# Altium PCB regulator.PcbDoc
Units mm, origin at the board's own origin, x right, y up, seen from the top; angles counter-clockwise.
Board outline 152.4 x 101.6 mm, 2 copper layers (Top Layer, Bottom Layer); 20 components, 10 nets, 46 pads, 0 vias.
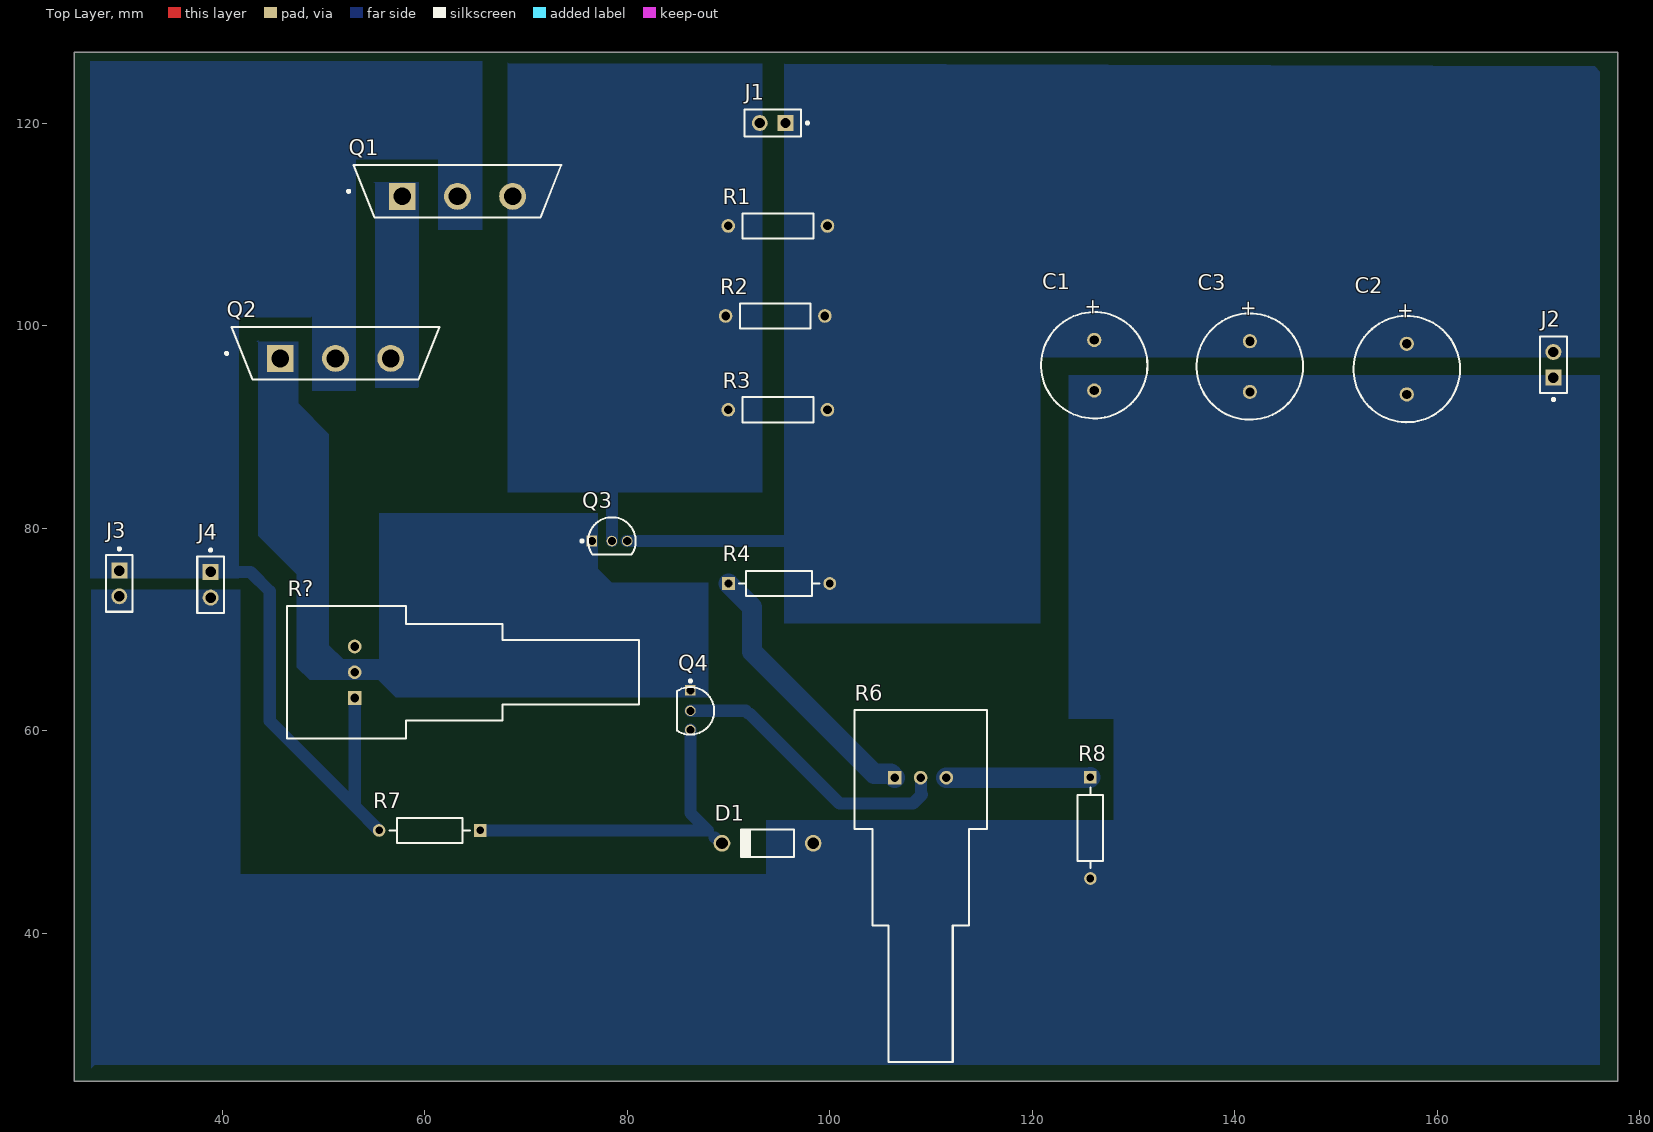
[diagram p0: Top Layer view]
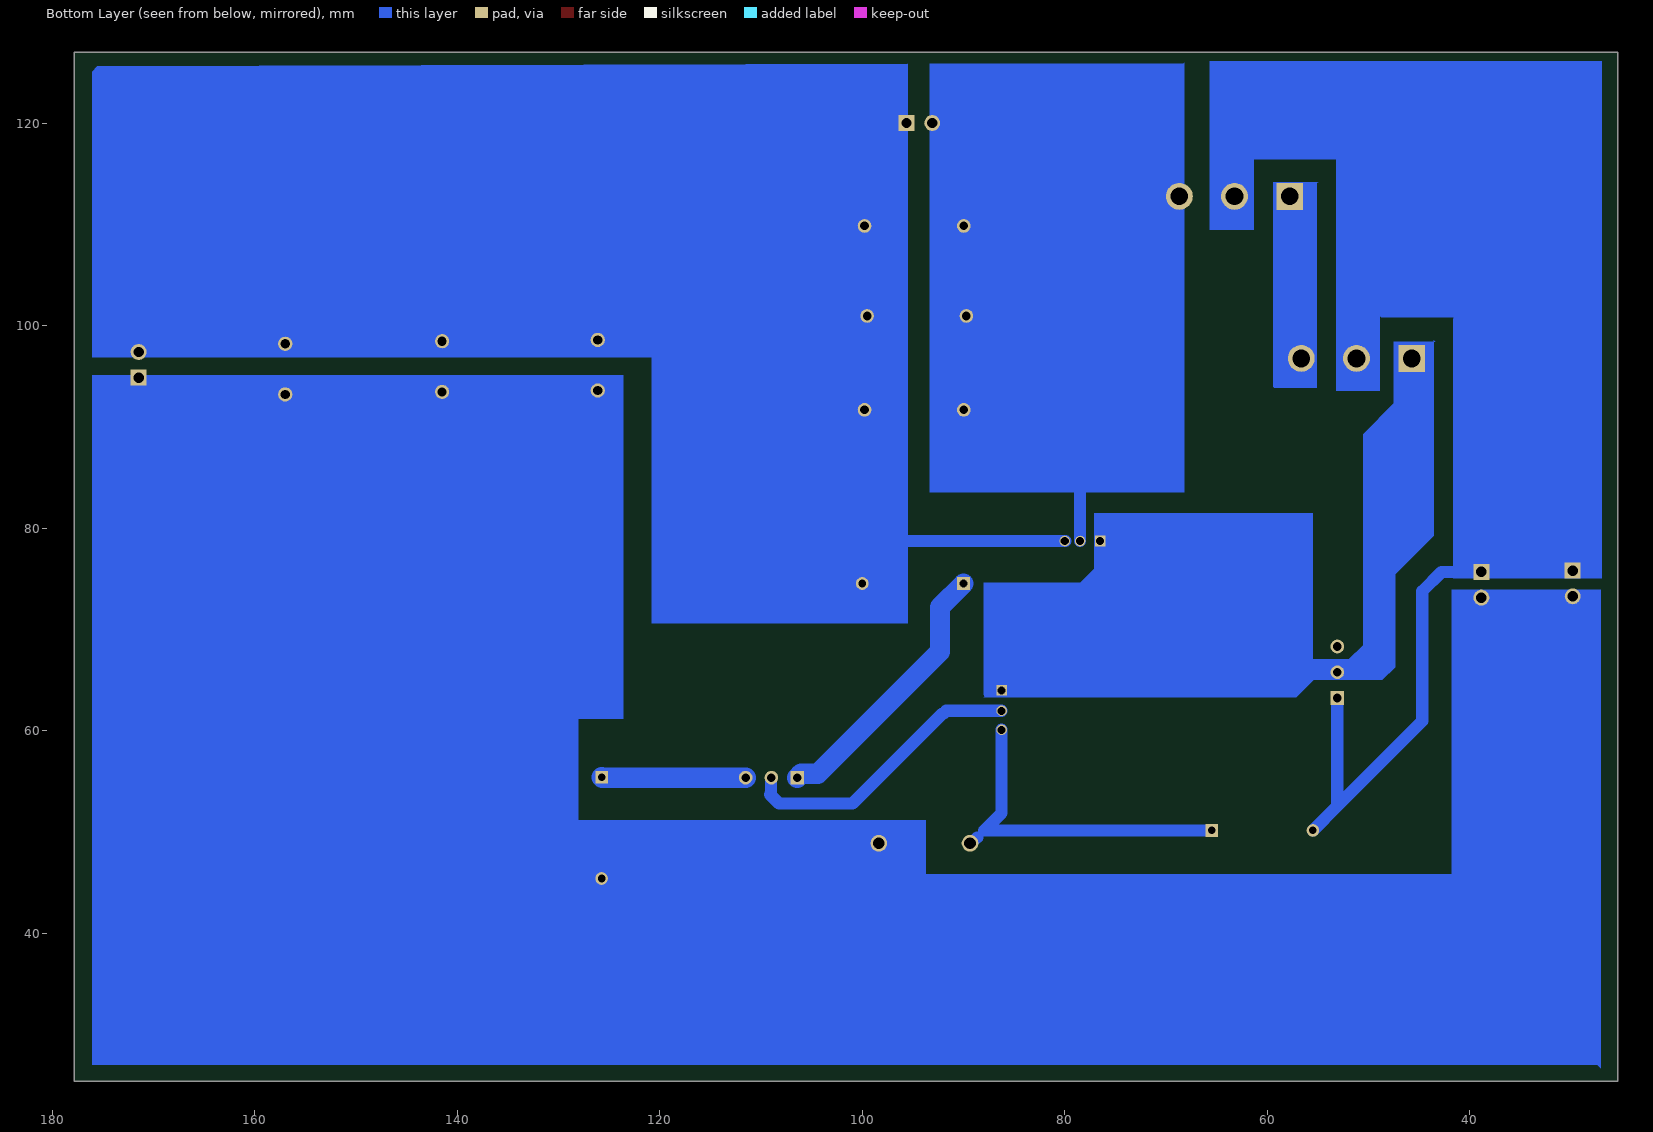
[diagram p1: Bottom Layer view, seen from below]
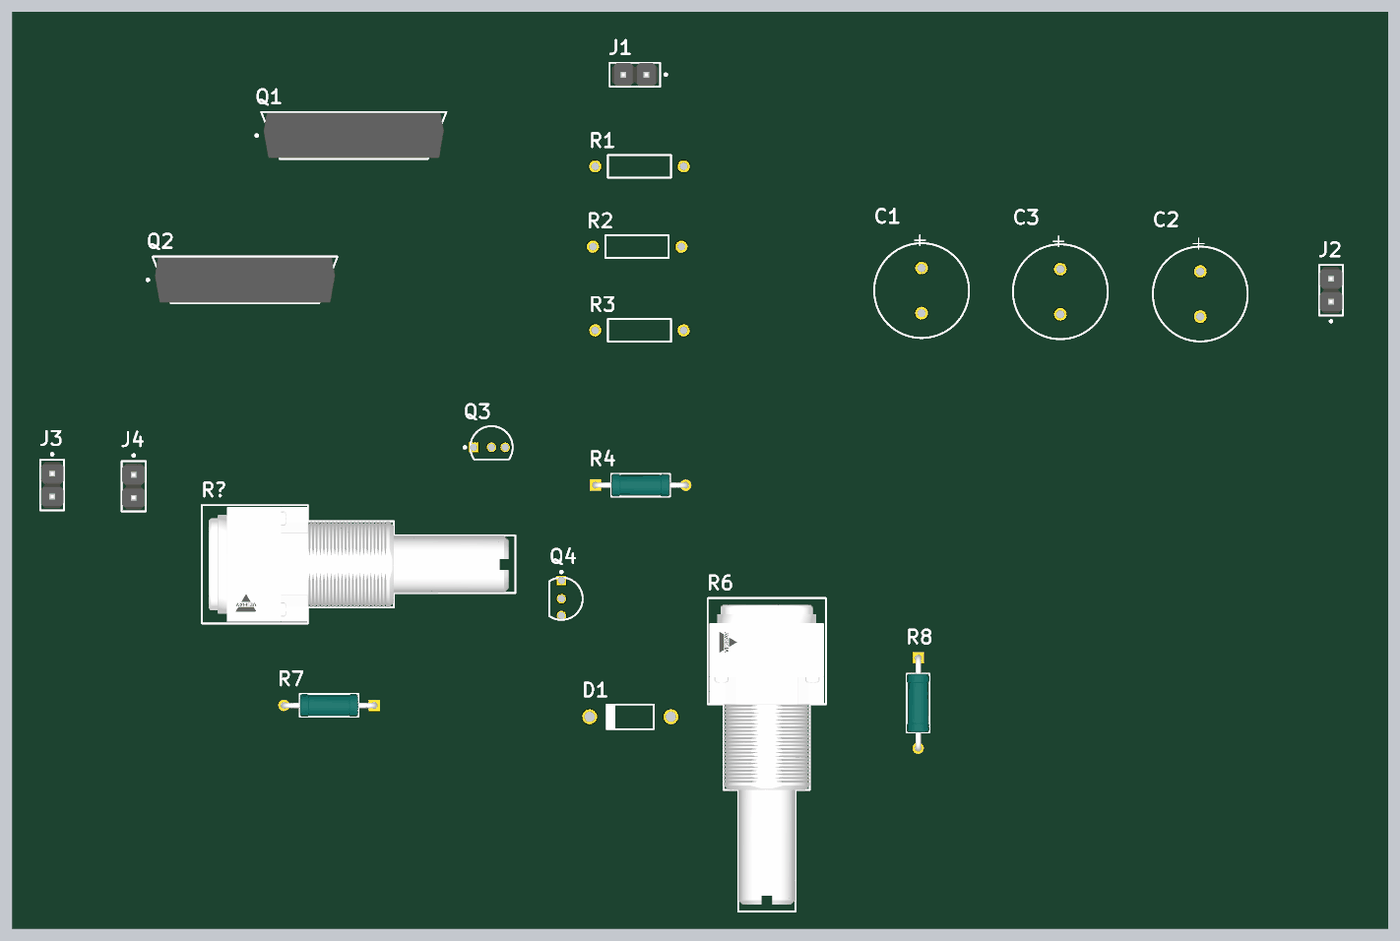
[diagram p2: 3D render of the assembled board from above, using the file's embedded part models]

## Layer stack, top to bottom
Top Solder: solder mask 0.0102, Solder Resist, Dk 3.5
Top Layer: signal copper 0.0356
Dielectric 1: dielectric 0.32, FR-4, Dk 4.8
Bottom Layer: signal copper 0.0356
Bottom Solder: solder mask 0.0102, Solder Resist, Dk 3.5

## Board outline
25.4,25.4 177.8,25.4 177.8,127 25.4,127

## Design rules (kind name [scope] priority, off if disabled: settings)
Clearance [All] p1: gap=0.254 ignorepadtopadclearanceinfootprint=FALSE except(0: Arc-Hole Track-Hole SMDPad-Hole THPad-Hole Via-Hole Fill-Hole Poly-Hole Region-Hole Text-Hole)
PolygonConnect [All] p1: connectstyle=Relief reliefconductorwidth=0.254 reliefentries=4 polygonreliefangle="90 Angle" airgapwidth=0.254
RoutingVias [All] p1: holewidth=0.711 width=1.27 viastyle="Through Hole" minholewidth=0.711 minwidth=1.27 maxholewidth=0.711 maxwidth=1.27
SilkToSilkClearance [All] p1: silktosilkclearance=0
SilkToSolderMaskClearance [IsPad] p1: minsilkscreentomaskgap=0 clearancetoexposedcopper=TRUE
SolderMaskExpansion [All] p1: expansion=0.102 istentingtop=FALSE
Width [All] p1: maxlimit=2 minlimit=0.7 preferedwidth=1.2
28 further rules are at their usual default settings.

## Components (designator, comment, footprint, x,y, rotation, side; value= is the part's Value field where it differs from the comment)
C1 "ECA-1HHG471" PNSC-CAP-10x20-P2 126.111,96.099 r270 top
C2 "ECA-1HHG471" PNSC-CAP-10x20-P2 156.972,95.718 r270 top
C3 "ECA-1HHG471" PNSC-CAP-10x20-P2 141.478,95.972 r270 top
D1 "1N4738A" FAIR-DO-41-2_V 93.853,48.895 r180 top
J1 "M20-9990246" FP-M20-9990246-MFG 94.361,120.015 r180 top
J2 "M20-9990246" FP-M20-9990246-MFG 171.45,96.139 r90 top
J3 "M20-9990246" FP-M20-9990246-MFG 29.845,74.549 r270 top
J4 "M20-9990246" FP-M20-9990246-MFG 38.862,74.422 r270 top
Q1 "2SC5200-O(Q)" FP-2-21F1A-MFG 63.235,113.276 r90 top
Q2 "2SC5200-O(Q)" FP-2-21F1A-MFG 51.192,97.274 r90 top
Q3 "BC547B" ONSC-TO-92-3-29-11#1 78.486,78.74 r0 top
Q4 "BC547B" ONSC-TO-92-3-29-11#2 86.233,61.976 r270 top
R1 "OD103JE" OMTE-RES7X2.5-2 94.869,109.855 r0 top
R2 "OD103JE" OMTE-RES7X2.5-2 94.615,100.965 r0 top
R3 "OD103JE" OMTE-RES7X2.5-2 94.869,91.694 r0 top
R4 "MRS25000C1001FCT00" FP-MRS25-MFG 94.996,74.549 r0 top
R6 "248FGJSPXB25102MA" FP-248FGJSPXB25102MA-MFG 108.966,44.679 r90 top
R7 "MRS25000C1001FCT00" FP-MRS25-MFG 60.499,50.165 r180 top
R8 "MRS25000C1001FCT00" FP-MRS25-MFG 125.73,50.419 r270 top
R? "248FGJSPXB25102MA" FP-248FGJSPXB25102MA-MFG 63.779,65.786 r180 top

## Footprints (in the part's own frame and the unit in brackets; to place one, negate y for a bottom-side part, rotate by r counter-clockwise, add the part's x,y. Pads: shape width x height; smd on the part's side, far side on the other; paste and mask are expansions set on the pad)
FAIR-DO-41-2_V [mm] "2-Leads, Axial leaded, Body 2.72x5.2mm, Pin Spacing 9mm"
  round 1.65 hole 1.15: 1(-4.5,0) 2(4.5,0)
  silkscreen extent -2.6,-1.36 2.6,1.36, body extent -4.93,-1.36 4.93,1.36, height 2.71
FP-2-21F1A-MFG [mm]
  rect 2.65x2.65 hole 1.75 paste-1000 mask+0: 1(-0.5,5.45)
  round 2.65 hole 1.75 paste-1000 mask+0: 2(-0.5,0) 3(-0.5,-5.45)
  silkscreen extent -2.6,-10.25 2.6,10.87, body extent -2.7,-10.35 2.7,10.35, height 0.25
FP-248FGJSPXB25102MA-MFG [mm]
  rect 1.35x1.35 hole 0.85 paste-1000 mask+0: 1(10.693,2.54)
  round 1.35 hole 0.85 paste-1000 mask+0: 2(10.693,0) 3(10.693,-2.54)
  silkscreen extent -17.36,-6.55 17.36,6.55, body extent -17.46,-6.65 17.46,6.65, height 0.25
FP-M20-9990246-MFG [mm]
  rect 1.57x1.57 hole 1.02 paste-1000 mask+0: 1(-1.27,0)
  round 1.57 hole 1.02 paste-1000 mask+0: 2(1.27,0)
  silkscreen extent -3.55,-1.32 2.79,1.32, body extent -2.89,-1.42 2.89,1.42, height 0.25
FP-MRS25-MFG [mm]
  rect 1.25x1.25 hole 0.75 paste-1000 mask+0: 1(-5,0)
  round 1.25 hole 0.75 paste-1000 mask+0: 2(5,0)
  silkscreen extent -3.98,-1.25 3.98,1.25, body extent -5.72,-1.35 5.72,1.35, height 0.25
OMTE-RES7X2.5-2 [mm] "Resistor, Axial; Body 7x2.5mm, Lead Dia. 0.6mm"
  round 1.35 hole 0.85: 1(-4.9,0) 2(4.9,0)
  silkscreen extent -3.5,-1.25 3.5,1.25, body extent -3.5,-1.25 3.5,1.25, height 2.5
ONSC-TO-92-3-29-11#1 [mm] "TO, 3-Leads, Body Dia 4.7mm, Pitch 1.27mm"
  rect 1.05x1.05 hole 0.8: 1(-1.986,0)
  round 1.05 hole 0.8: 2(0,0) 3(1.514,0)
  silkscreen extent -3.07,-1.34 2.35,2.35, body extent -2.35,-1.33 2.36,2.36, height 7.87
ONSC-TO-92-3-29-11#2 [mm] "TO, 3-Leads, Body Dia 4.7mm, Pitch 1.27mm"
  rect 1.05x1.05 hole 0.8: 1(-2.024,0)
  round 1.05 hole 0.8: 2(0,0) 3(1.876,0)
  silkscreen extent -3.07,-1.34 2.35,2.35, body extent -2.35,-1.33 2.36,2.36, height 7.87
PNSC-CAP-10x20-P2 [mm] "THD, 2-Leads, Dia 10.5mm, Body Length 22mm, Pin Spacing 5mm"
  round 1.4 hole 0.9: 1(-2.5,0) 2(2.5,0)
  silkscreen extent -5.25,-5.25 5.25,5.25, body extent -5.25,-5.25 5.25,5.25, height 22

## Part data
C1 C2 C3: library part CMP-2000-05308-1, "Aluminum Electrolytic Capacitor, 470 uF, +/- 20%, 50 V, -55 to 105 degC, 2-Pin THD, RoHS, Bulk", Capacitance=470µF, Case Size/Dimension=Ø10x20mm, Lifetime@Temperature=2000Hrs@105degC, Manufacturer=Panasonic, Operating Temp Range=-55to+105degC, Operating Temp-Max=105degC, Package Description="2-Pin Through Hole Device, Dia 10 mm, Body Length 20 mm, Pin Spacing 5 mm", Package Reference=CAP-10x20-P2, Package Version=Nov-12, Rated Voltage=50V, Ripple Current=530mA, Datasheet URL=http://www.alliedelec.com/images/products/datasheets/bm/Panasonic/70067776.pdf, Datasheet Version=Nov-12, Manufacturer URL=http://www.panasonic.com/, Package URL=http://www.alliedelec.com/images/products/datasheets/bm/Panasonic/70067776.pdf, Series=NHG, Type=Radial
D1: library part CMP-0892-00011-1, "Zener Diode, 8.2V, 1W, 5%, -65 to 200 degC, 2-Pin DO-41, Body 2.72 x 5.2 mm, RoHS", Manufacturer="Fairchild Semiconductor", Operating and Storage Temperature Range="-65 to 200 degC", Test Current IZ (mA)=31, Tolerance=5%, ComponentLink1Description="Manufacturer URL", ComponentLink1URL=http://www.fairchildsemi.com/, ComponentLink2Description=Datasheet, ComponentLink2URL=http://www.fairchildsemi.com/ds/1N/1N4744A.pdf, ComponentLink3Description="Package Specification", ComponentLink3URL=http://www.fairchildsemi.com/dwg/DO/DO41A.pdf, DatasheetVersion="Rev. H3", IR (uA)=10, Mounting Technology="Through Hole", PackageDescription="2-Pin Axial leaded, Body 2.72 x 5.2 mm, Lead Spread 25.4 mm", PackageReference=DO-41-2, PackageVersion="Rev. 2", PartNumber=1N4738A, PD (W)=1, RoHS=TRUE, VZ (Max.) (V)=8.61, VZ (Min.) (V)=7.79, ZZ (Max) (ohm)=4
J1 J2 J3 J4: library part CMP-15831-000009-1, "CONN HEADER VERT 2POS 2.54MM", Current Rating=3A, Manufacturer=Harwin, Temperature="-40°C to +105°C", Temperature Range High=+105°C, Temperature Range Low=-40°C, Automotive=No, Category=Conn, ComponentLink2Description=Datasheet, ComponentLink2URL=https://cdn.harwin.com/pdfs/M20-999.pdf, Conn Gender=Male, Conn Orientation=Vertical, Contact Material=Tin,Nickel, Device Class L1=Connectors, Device Class L2="Headers and Wire Housings", Device Class L3=unset, Digikey Description="CONN HEADER VERT 2POS 2.54MM", Height=8.99mm, Lead Free=Yes, Manufacturer Part Number=M20-9990246, Mouser Description="2.54mm (0.1\") Pitch SIL Vertical PC Tail Pin Header, 6.1mm mating pin height, tin, 2 contacts", Number Of Contacts=2, Number Of Rows=1, Octopart=https://octopart.com/m20-9990246-harwin-2590635, Package=M20-9990246, Pitch=2.54mm, RoHS=TRUE
Q1 Q2: library part CMP-35913-000004-1, "TRANS NPN 230V 15A TO-3PL", Collector Base Voltage (VCBO)=230V, Collector-emitter Voltage-Max=3V, Current Rating=15A, Emitter Base Voltage (VEBO)=5V, Frequency=30MHz, Max Operating Temperature=150°C, Max Power Dissipation=150W, Min Operating Temperature=-55°C, Package Quantity=100, Collector Emitter Breakdown Voltage=230V, Collector Emitter Voltage (VCEO)=230V, Contact Plating=Copper, Element Configuration=Single, Gain Bandwidth Product=30MHz, hFE Min=80, Lead Free="Lead Free", Max Collector Current=15A, Mount="Through Hole", Number of Elements=1, Number of Pins=3, Packaging=Rail/Tube, Polarity=NPN, Power Dissipation=150W, Radiation Hardening=No, Series=-, Transition Frequency=30MHz, Voltage Rating (DC)=230V
Q3 Q4: library part CMP-1048-01467-1, "Amplifier Transistor, NPN Silicon, 3-Pin TO-92, Bulk Box", Manufacturer="On Semiconductor", ComponentLink1Description="Manufacturer URL", ComponentLink1URL=http://www.onsemi.com/, ComponentLink2Description=Datasheet, ComponentLink2URL=http://www.onsemi.com/pub_link/Collateral/BC546-D.PDF, ComponentLink3Description="Package Specification", ComponentLink3URL=http://www.onsemi.cn/pub_link/Collateral/2N6426-D.PDF, DatasheetVersion="Rev. 7", fT Min (MHz)=150, IC Continuous (A)=0.1, Mounting Technology="Through Hole", PackageDescription="3-Pin Transistor Outline, Body 4.825 x 3.685 mm, Pitch 1.27 mm", PackageReference=TO-92-3-29-11_AM_SL, PackageVersion="Rev. AM", Packing="Bulk Box", PartNumber=BC547B, Polarity=NPN, RoHS=FALSE
R1 R2 R3: library part CMP-2000-06865-1, "Little Demon(R) Carbon Composition Molded OD Series, 250 V, 10 KOhm, +/-5%, -70 to 130 degC, 2-Pin THD, RoHS, Bulk", Manufacturer=Ohmite, Operating Temperature=-, Package / Case=Axial, Package Description="2-Pin THD Resistor, Body 7 x 2.5 mm, Lead Dia. 0.6 mm", Package Reference=RES7X2.5, Power (Watts)=0.25W,1/4W, Power Rating=0.25W, Resistance (Ohms)=10k, Standard Package=100, Tolerance=±5%, Catalog Drawings=OD,OF,OASeries, Category=Resistors, Composition=CarbonComposition, Datasheet URL=http://www.ohmite.com/cat/res_od_of_oa.pdf, Datasheet Version=06/2016, EDA / CAD Models=DownloadfromAcceleratedDesigns, Family=ThroughHoleResistors, Features=PulseWithstanding, Height=-, Manufacturer URL=http://www.ohmite.com/, Mounting Technology=ThroughHole, Number of Terminations=2, Online Catalog=OD,OF,OASeries,LittleDemon®, Packaging=Bulk, PartNumber=OD103JE, RoHS Information="LittleDemon\"E\"SeriesMaterialDeclaration", Series=LittleDemon®OD, Size / Dimension="0.098\"Diax0.276\"L(2.50mmx7.00mm)", Supplier Device Package=Axial, Temperature Coefficient=-
R4 R7 R8: library part CMP-02408-000051-1, "RES 1K OHM 0.6W 1% AXIAL", Case/Package=Axial, Max Operating Temperature=155°C, Max Power Dissipation=600mW, Min Operating Temperature=-55°C, Package Quantity=5000, Resistance=1kR, Resistance Tolerance=1%, Resistor Type="Metal Film", Temperature Coefficient=50ppm/°C, Voltage Rating=350V, Construction=Cylindrical, Contact Plating=Tin, Diameter=2.5mm, Lead Diameter=0.6mm, Lead Free="Lead Free", Length=6.5mm, Military Standard=Not, Mount="Through Hole", Number of Pins=2, Number of Terminations=2, Packaging="Tape and Reel", Power Rating=600mW, Radiation Hardening=No, RoHS Compliant=Yes, Series=MRS25, Technology="THIN FILM", Termination=Axial, Tolerance=1%, Voltage Rating (DC)=350V, Weight=0.00776oz, Width=2.5mm
R6 R?: library part CMP-02410-000007-1, "POT PLASTIC LINEAR", Insulation Resistance=1GR, Max Operating Temperature=125°C, Min Operating Temperature=-55°C, Package Quantity=50, Power Rating=500mW, Resistance=1kR, Resistance Tolerance=20%, Resistor Type=Potentiometer, Temperature Coefficient=1000ppm/°C, Depth=12.7mm, Height=13.11mm, Hole Diameter=9.525mm, Length=30.73mm, Military Standard=Not, Mount="Through Hole", Number of Gangs=1, Number of Turns=1, Packaging=Bulk, Radiation Hardening=No, RoHS Compliant=Yes, Technology="CONDUCTIVE PLASTIC", Termination=Pin, Tolerance=20%, Type=Potentiometer

## Nets (pads, with @x,y where several pads share a name; then routed paths per layer and width w, separated by ;. In a path a pad name is that pad's centre, name@x,y a point inside that pad or via, vN(x,y) a via of type N, cw(c..) or ccw(c..) an arc to the next point about the centre after c; other vN are vias at no path point)
GND: C1.2 C2.2 C3.2 D1.1 J2.1 J3.2 J4.2 R8.2
NetC1_1: C1.1 C2.1 C3.1 J1.1 J2.2 Q3.3 R1.2 R2.2 R3.2 R4.2 | length 15.7
  Bottom Layer w1.2: Q3.3@79.94,78.74 95.631,78.74
NetD1_2: D1.2 Q4.3 R7.1 | length 34.1
  Bottom Layer w1.2: R7.1 87.961,50.165 86.233,51.893 Q4.3 ; 88.646,49.48 89.231,48.895 D1.2
NetJ1_2: J1.2 Q1.3 Q3.2 R1.1 R2.1 R3.1 | length 6.5
  Bottom Layer w1.2: Q3.2 78.486,84.836 78.74,85.09
NetJ3_1: J3.1 J4.1 Q1.2 Q2.2 R7.2 R?.1 | length 45.4
  Bottom Layer w1.2: J4.1 42.799,75.692 44.704,73.787 44.704,60.96 53.086,52.578 ; R?.1 53.086,52.578 ; R7.2 53.086,52.578
NetQ1_1: Q1.1 Q2.3 | length 16.5
  Bottom Layer w1.2: Q2.3 56.642,111.633 Q1.1
NetQ2_1: Q2.1 Q3.1 Q4.1 R?.2 | length 84.4
  Bottom Layer w1.2: Q2.1 45.742,85.322 48.387,82.677 48.387,68.326 50.927,65.786 R?.2 69.088,65.786 76.073,72.771 ; 76.5,74.93 76.5,73.198 76.073,72.771 ; Q3.1 76.073,78.313 76.073,72.771 ; 77.089,74.93 86.233,65.786 Q4.1
NetQ4_2: Q4.2 R6.2 | length 28.7
  Bottom Layer w1.2: Q4.2 91.694,61.976 91.948,61.722 92.075,61.722 100.965,52.832 108.204,52.832 109.093,53.721 108.995,53.819 108.995,55.343 R6.2
NetR4_1: R4.1 R6.1 | length 26.9
  Bottom Layer w2: R4.1 92.329,72.216 92.329,67.818 104.394,55.753 106.045,55.753 R6.1
NetR6_3: R6.3 R8.1 | length 14.2
  Bottom Layer w2: R6.3 125.683,55.372 R8.1
pads on no net: R?.3

## Other copper
Bottom Layer:
  region net NetQ2_1: 47.371,76.2 47.371,66.294 48.641,65.024 56.769,65.024 56.769,66.294 56.007,67.056 51.943,67.056 50.546,68.453 50.546,71.882
  region net NetQ2_1: 43.434,98.425 47.498,98.425 47.498,92.329 50.546,89.281 50.546,67.056 50.419,66.929 57.277,66.929 57.277,66.04 48.006,66.04 48.006,74.803 43.561,79.248 43.561,98.552
  region net NetQ1_1: 54.991,114.173 59.436,114.173 59.436,93.98 59.309,93.853 55.118,93.853 55.118,114.046
  region net NetQ2_1: 77.089,81.471 77.089,76.01 78.486,74.612 88.011,74.612 88.011,63.563 87.884,63.436 88.011,63.309 57.15,63.309 55.372,65.087 55.499,65.215 55.499,81.471
  region net GND: 123.571,95.123 176.022,95.123 176.022,27.051 27.432,27.051 27.051,26.67 27.051,73.914 41.783,73.914 41.783,73.533 41.783,73.152 41.783,45.847 93.726,45.847 93.726,51.181 128.016,51.181 128.016,61.214 123.571,61.214
  region net NetC1_1: 95.504,125.856 95.504,70.612 120.777,70.612 120.777,96.901 176.022,96.901 176.022,125.095 175.514,125.603
  region net NetJ1_2: 68.199,125.857 68.199,124.968 68.199,83.566 93.345,83.566 93.345,125.857 68.326,125.857 68.199,125.984
  region net NetJ3_1: 26.998,75.057 41.656,75.057 41.656,100.711 41.529,100.838 48.768,100.838 48.895,100.965 48.895,93.599 53.213,93.599 53.213,94.107 53.213,94.615 53.213,116.459 61.341,116.459 61.341,109.474 65.659,109.474 65.659,126.111 28.702,126.111 26.998,126.111

## Text inside footprints (layer, text, board x,y; h text height)
C1: Top Overlay "+" at 125.349,102.703 h1.5 r270
C2: Top Overlay "+" at 156.21,102.322 h1.5 r270
C3: Top Overlay "+" at 140.716,102.576 h1.5 r270